# EAGLE board Zcontrol (EAGLE 5.10)
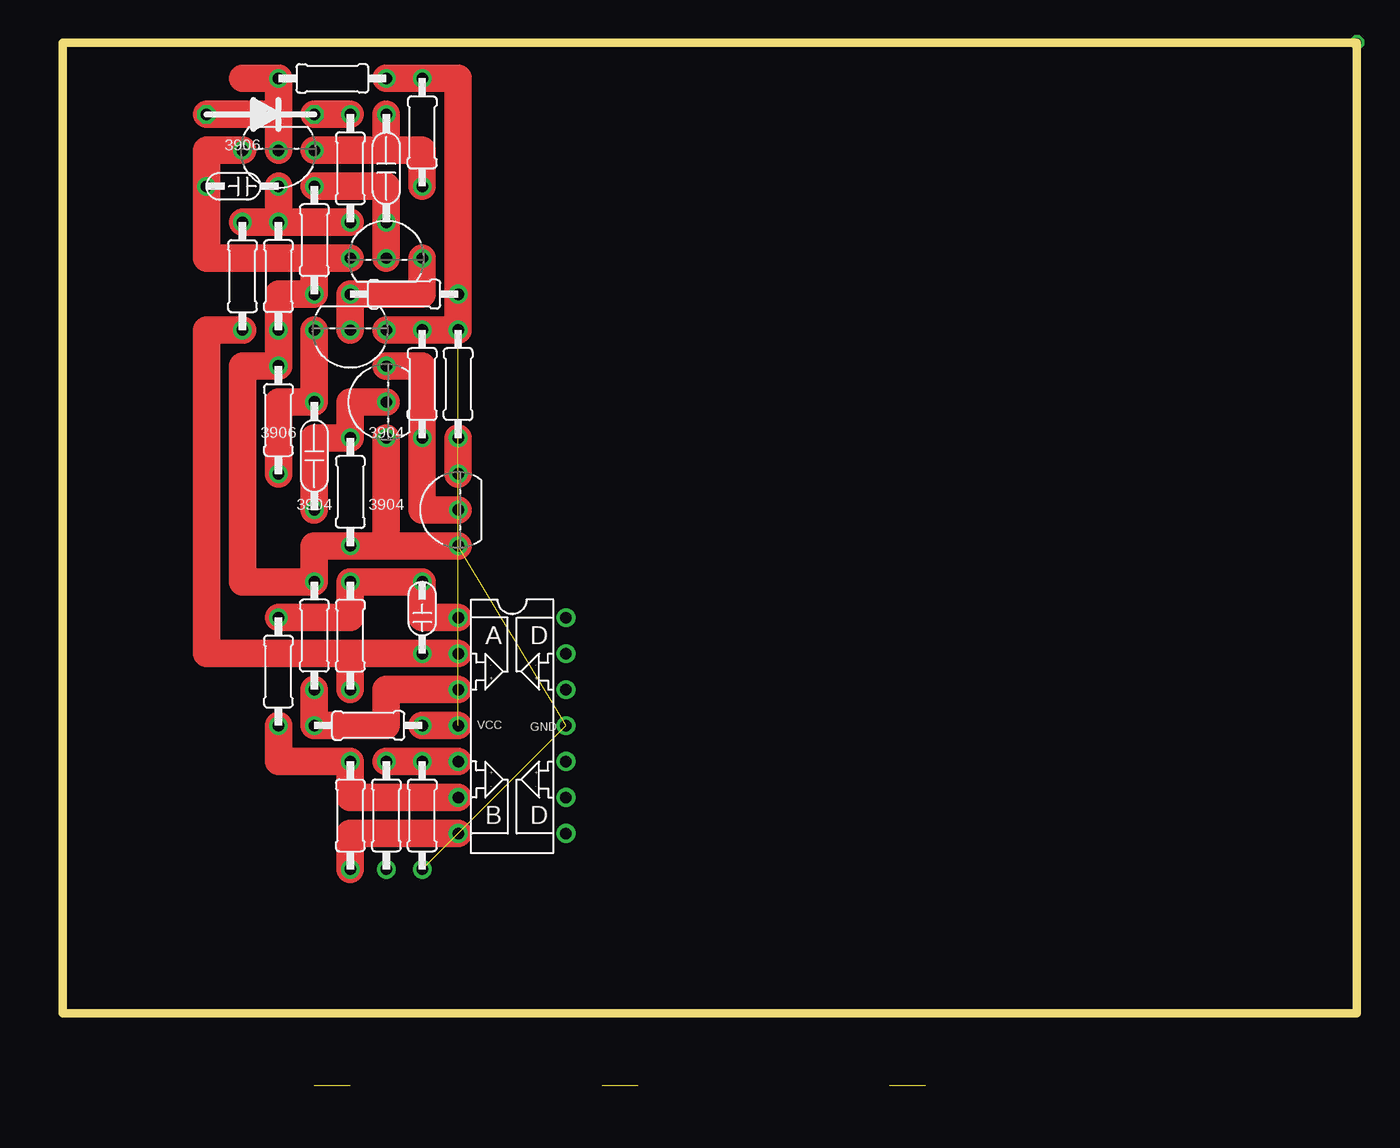
[diagram p0: board, top side]
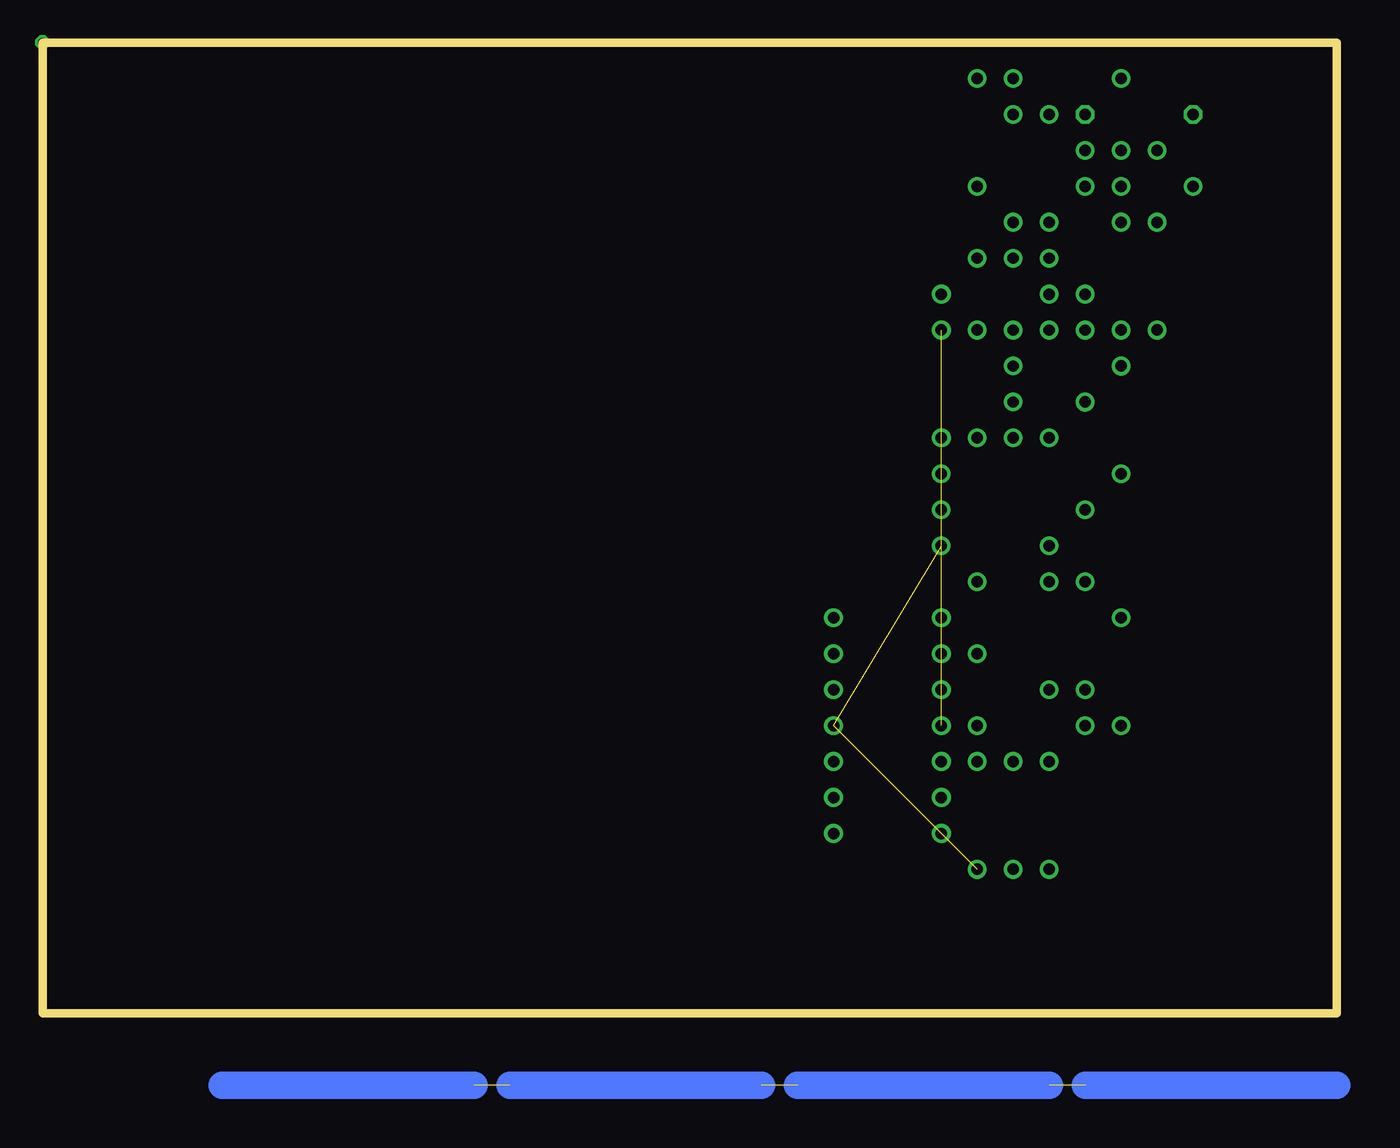
[diagram p1: board, bottom side, seen from below]

Size 91.44 x 68.58 mm. Coordinates in mm from the lower left corner, seen from the top.
Outline: 91.44,0 91.44,68.58 0,68.58 0,0 91.44,0
Copper layers (1*16): Top 0.035mm / dielectric 1.5mm / Bottom 0.035mm
Design rules "default": minimum track width 10mil, minimum drill 24mil, track to track 8mil, track to pad 8mil, pad to pad 8mil, via to via 8mil, smd to smd 8mil, copper to edge 40mil, drill to drill 8mil, minimum pad ring 10mil, minimum via ring 8mil, stop-mask expansion 4mil, vias tented up to drill 0mil, thermal gap 10mil

## Footprints (pad centres in the part's own frame; a part is rotated, then mirrored left to right if it is on the bottom)
SMALL-CAPACITOR = drill 0.813 round: IN1 0,0; IN2 5.08,0
TRANSISTOR = drill 0.8 round: P$1 0,0; P$2 2.54,0; P$3 -2.54,0
DIODE = drill 0.8 octagon: P$1 -3.81,0; P$2 3.81,0
RESISTOR = drill 0.813 round: IN1 -3.81,0; IN2 3.81,0
LM324-QUAD-OPAMP = drill 0.813 round: AMINUS -3.81,5.08; AOUT -3.81,7.62; APLUS -3.81,2.54; BMINUS -3.81,-5.08; BOUT -3.81,-7.62; BPLUS -3.81,-2.54; CMINUS 3.81,5.08; COUT 3.81,7.62; CPLUS 3.81,2.54; DMINUS 3.81,-5.08; DOUT 3.81,-7.62; DPLUS 3.81,-2.54; GND 3.81,0; VCC -3.81,0
CAPACITOR = drill 0.813 round: IN1 -2.54,0; IN2 5.08,0

## Placement (x,y rotation side)
E$1  [SMALL-CAPACITOR]  35.56,-36.83 270 top  (outside the outline)
E$3  [TRANSISTOR]  15.24,60.96 180 top
E$4  [TRANSISTOR]  81.28,-39.37 90 top  (outside the outline)
E$5  [DIODE]  13.97,63.5 0 top
E$6  2k  [RESISTOR]  85.09,-31.75 0 top  (outside the outline)
E$7  4k  [RESISTOR]  19.05,66.04 180 top
E$8  10k  [RESISTOR]  87.63,-34.29 0 top  (outside the outline)
E$9  910  [RESISTOR]  20.32,59.69 270 top
E$10  2.2uF  [SMALL-CAPACITOR]  15.24,58.42 180 top
E$11  [LM324-QUAD-OPAMP]  31.75,20.32 0 top
E$12  [RESISTOR]  38.1,-38.1 270 top  (outside the outline)
E$13  [RESISTOR]  50.8,-38.1 270 top  (outside the outline)
E$14  [CAPACITOR]  35.56,-31.75 90 top  (outside the outline)
E$15  100k  [RESISTOR]  15.24,52.07 90 top
E$16  100k  [RESISTOR]  12.7,52.07 270 top
E$17  [CAPACITOR]  53.34,-31.75 90 top  (outside the outline)
E$18  50nF  [SMALL-CAPACITOR]  25.4,25.4 90 top
E$19  200k  [RESISTOR]  20.32,26.67 270 top
E$20  2k  [RESISTOR]  17.78,26.67 90 top
E$21  5k  [RESISTOR]  21.59,20.32 0 top
E$22  2k  [RESISTOR]  15.24,24.13 270 top
E$23  2k  [RESISTOR]  20.32,13.97 270 top
E$24  [LM324-QUAD-OPAMP]  24.13,-36.83 180 top  (outside the outline)
E$25  [RESISTOR]  17.78,-38.1 270 top  (outside the outline)
E$26  [RESISTOR]  30.48,-38.1 270 top  (outside the outline)
E$27  [CAPACITOR]  15.24,-31.75 90 top  (outside the outline)
E$28  [CAPACITOR]  33.02,-31.75 90 top  (outside the outline)
E$29  2k  [RESISTOR]  25.4,13.97 270 top
E$30  20k  [RESISTOR]  22.86,13.97 270 top
E$31  10K  [RESISTOR]  25.4,62.23 270 top
E$32  500Pf  [CAPACITOR]  22.86,58.42 90 top
E$33  100K  [RESISTOR]  17.78,54.61 90 top
E$34  [TRANSISTOR]  22.86,53.34 0 top
E$35  2k  [RESISTOR]  24.13,50.8 0 top
E$36  [TRANSISTOR]  20.32,48.26 180 top
E$37  2k  [RESISTOR]  15.24,41.91 270 top
E$38  22Pf  [CAPACITOR]  17.78,38.1 90 top
E$39  2k  [RESISTOR]  69.85,-29.21 180 top  (outside the outline)
E$40  100k  [RESISTOR]  20.32,36.83 90 top
E$41  10k  [RESISTOR]  87.63,-39.37 0 top  (outside the outline)
E$42  10k  [RESISTOR]  87.63,-36.83 0 top  (outside the outline)
E$43  [TRANSISTOR]  22.86,43.18 90 top
E$44  2k  [RESISTOR]  25.4,44.45 90 top
E$45  [TRANSISTOR]  27.94,35.56 90 top
E$46  2k  [RESISTOR]  27.94,44.45 90 top
E$51  [CAPACITOR]  73.66,-34.29 270 top  (outside the outline)

## Library data of the parts
E$1 E$3-E$46 E$51 = RussellLibrary

## Nets
GND: E$3.P$2 E$10.IN2 E$11.GND E$15.IN1 E$20.IN2 E$29.IN2 E$33.IN1 E$34.P$3 E$37.IN1 E$40.IN1 E$43.P$3 E$45.P$3
S$1: E$3.P$1 E$5.P$1 E$7.IN2
S$2: E$5.P$2 E$9.IN1
S$4: E$9.IN2 E$10.IN1 E$15.IN2 E$16.IN1
S$5: E$11.AMINUS E$16.IN2 E$19.IN2
S$6: E$32.IN1 E$33.IN2 E$34.P$1
S$7: E$11.APLUS E$20.IN1 E$21.IN1
S$8: E$11.AOUT E$18.IN2 E$19.IN1 E$22.IN1
S$10: E$11.BMINUS E$22.IN2 E$23.IN1
S$11: E$11.BOUT E$23.IN2
S$12: E$11.BPLUS E$29.IN1 E$30.IN1
S$13: E$30.IN2
S$14: E$3.P$3 E$31.IN2 E$32.IN2
S$17: E$34.P$2 E$35.IN1 E$36.P$1
S$19: E$36.P$2 E$37.IN2 E$38.IN2
S$20: E$38.IN1 E$40.IN2 E$43.P$1
S$21: E$8.IN2 E$42.IN2
S$23: E$43.P$2 E$44.IN1 E$45.P$1
S$24: E$45.P$2 E$46.IN1
VCC: E$7.IN1 E$11.VCC E$21.IN2 E$31.IN1 E$35.IN2 E$36.P$3 E$44.IN2 E$46.IN2

## Tracks (layer width: path | path; a pad name or v marks a point on that pad's centre or on a via)
GND  (2 unrouted)
  Top 1.93: E$45.P$3 22.86,33.02 | 17.78,53.34 E$33.IN1 15.24,50.8 E$15.IN1 E$37.IN1 12.7,45.72 12.7,30.48 E$20.IN2 17.78,33.02 E$40.IN1 22.86,33.02 | 17.78,53.34 E$34.P$3 | 22.86,33.02 E$43.P$3 | 17.78,53.34 10.16,53.34 E$10.IN2 10.16,60.96 E$3.P$2
S$1
  Top 1.93: 12.7,66.04 E$7.IN2 15.24,63.5 | 15.24,63.5 E$3.P$1 | E$5.P$1 15.24,63.5
S$2
  Top 1.93: E$5.P$2 E$9.IN1
S$3  (3 unrouted)
  Bottom 1.93: 0,-5.08 17.78,-5.08 | 20.32,-5.08 38.1,-5.08 | 40.64,-5.08 58.42,-5.08 | 60.96,-5.08 78.74,-5.08
S$4
  Top 1.93: E$15.IN2 E$9.IN2 | E$15.IN2 E$10.IN1 | E$16.IN1 E$15.IN2
S$5
  Top 1.93: E$16.IN2 10.16,48.26 10.16,25.4 20.32,25.4 | 20.32,25.4 E$11.AMINUS | E$19.IN2 20.32,25.4
S$6
  Top 1.93: E$34.P$1 E$32.IN1 22.86,58.42 E$33.IN2
S$7
  Top 1.93: E$11.APLUS 22.86,22.86 22.86,20.32 E$21.IN1 E$20.IN1
S$8
  Top 1.93: E$11.AOUT 25.4,27.94 E$18.IN2 E$19.IN1 20.32,27.94 E$22.IN1
S$10
  Top 1.93: E$11.BMINUS 20.32,15.24 E$23.IN1 15.24,17.78 E$22.IN2
S$11
  Top 1.93: E$23.IN2 20.32,12.7 E$11.BOUT
S$12
  Top 1.93: E$11.BPLUS E$29.IN1 E$30.IN1
S$14
  Top 1.93: E$3.P$3 22.86,60.96 | 22.86,60.96 25.4,60.96 E$31.IN2 | 22.86,60.96 E$32.IN2
S$17
  Top 1.93: E$34.P$2 25.4,50.8 E$35.IN1 E$36.P$1
S$19
  Top 1.93: E$37.IN2 15.24,43.18 E$38.IN2 E$36.P$2
S$20
  Top 1.93: E$43.P$1 20.32,43.18 E$40.IN2 17.78,40.64 E$38.IN1
S$21  (1 unrouted)
S$23
  Top 1.93: E$45.P$1 25.4,35.56 E$44.IN1 25.4,45.72 E$43.P$2
S$24
  Top 1.93: E$45.P$2 E$46.IN1
S$25  (via drill 0.6)
  other vias: 91.44,68.58
VCC  (1 unrouted)
  Top 1.93: E$21.IN2 E$11.VCC | E$7.IN1 E$31.IN1 27.94,66.04 E$35.IN2 E$46.IN2 E$44.IN2 E$36.P$3

## Text on the board
Unrouted: Ir PhotoTrans | GND | VCC | X
tPlace: 3906 | 3906 | 3904 | 3904 | 3904 | 3904